# Altium PCB RMS.PcbDoc
Units mm, origin at the board's own origin, x right, y up, seen from the top; angles counter-clockwise.
Board outline 38 x 48 mm, 2 copper layers (Top Layer, Bottom Layer); 23 components, 19 nets, 107 pads, 22 vias.
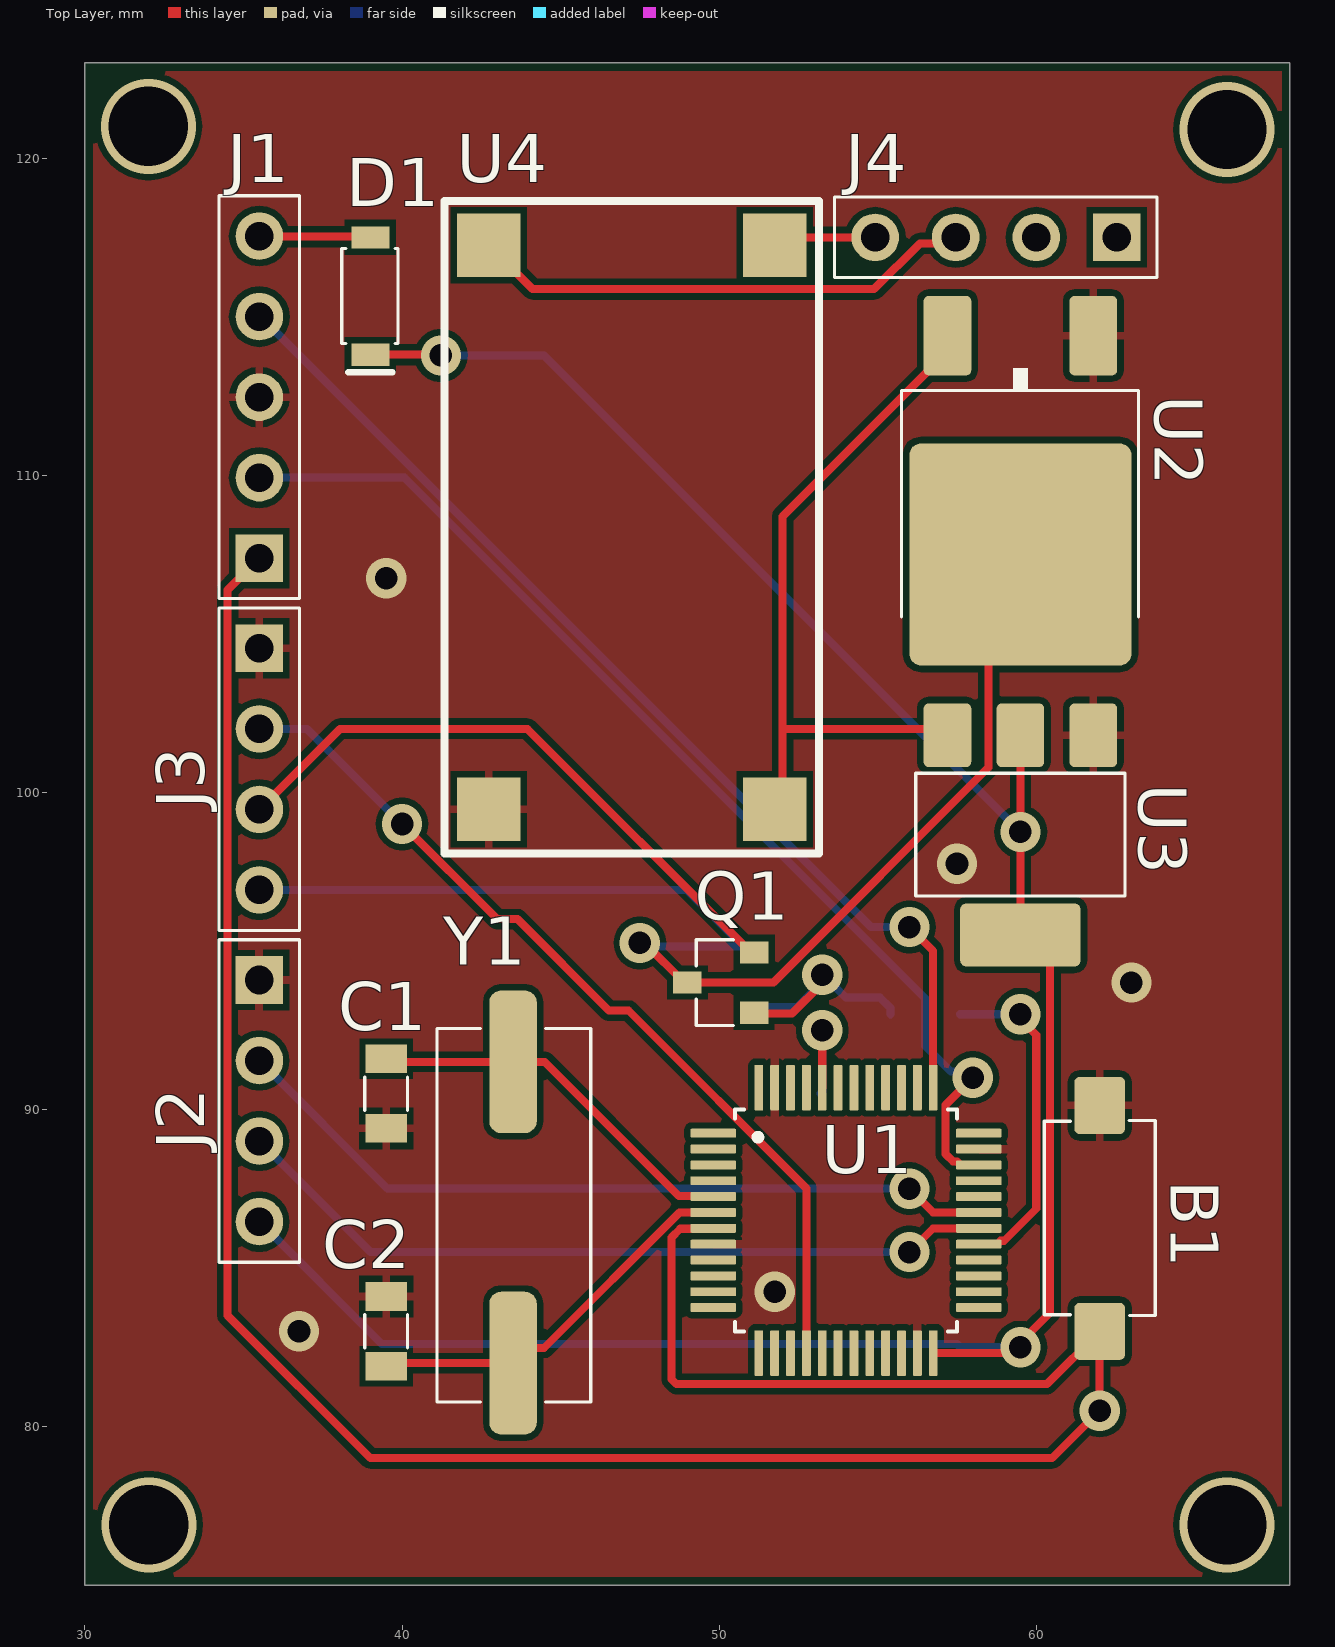
[diagram p0: Top Layer view]
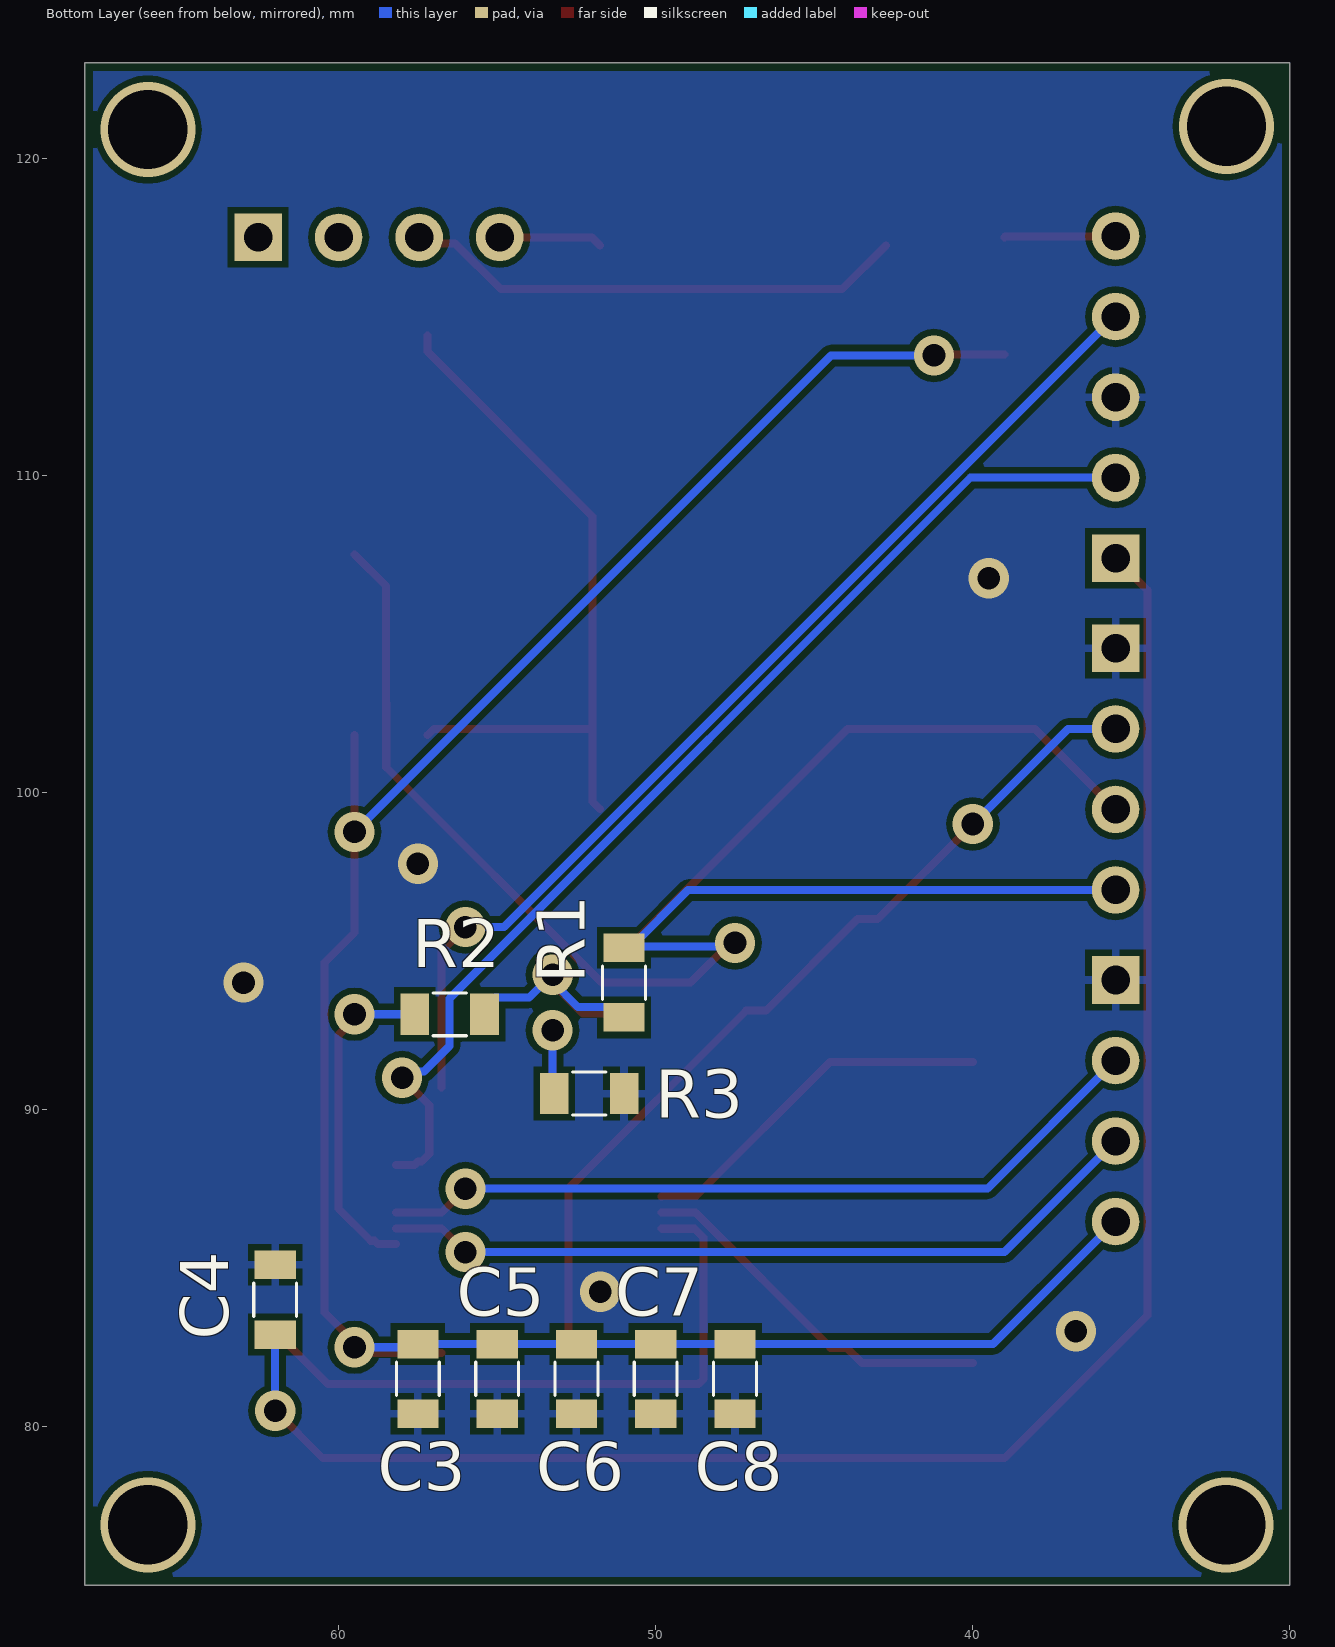
[diagram p1: Bottom Layer view, seen from below]
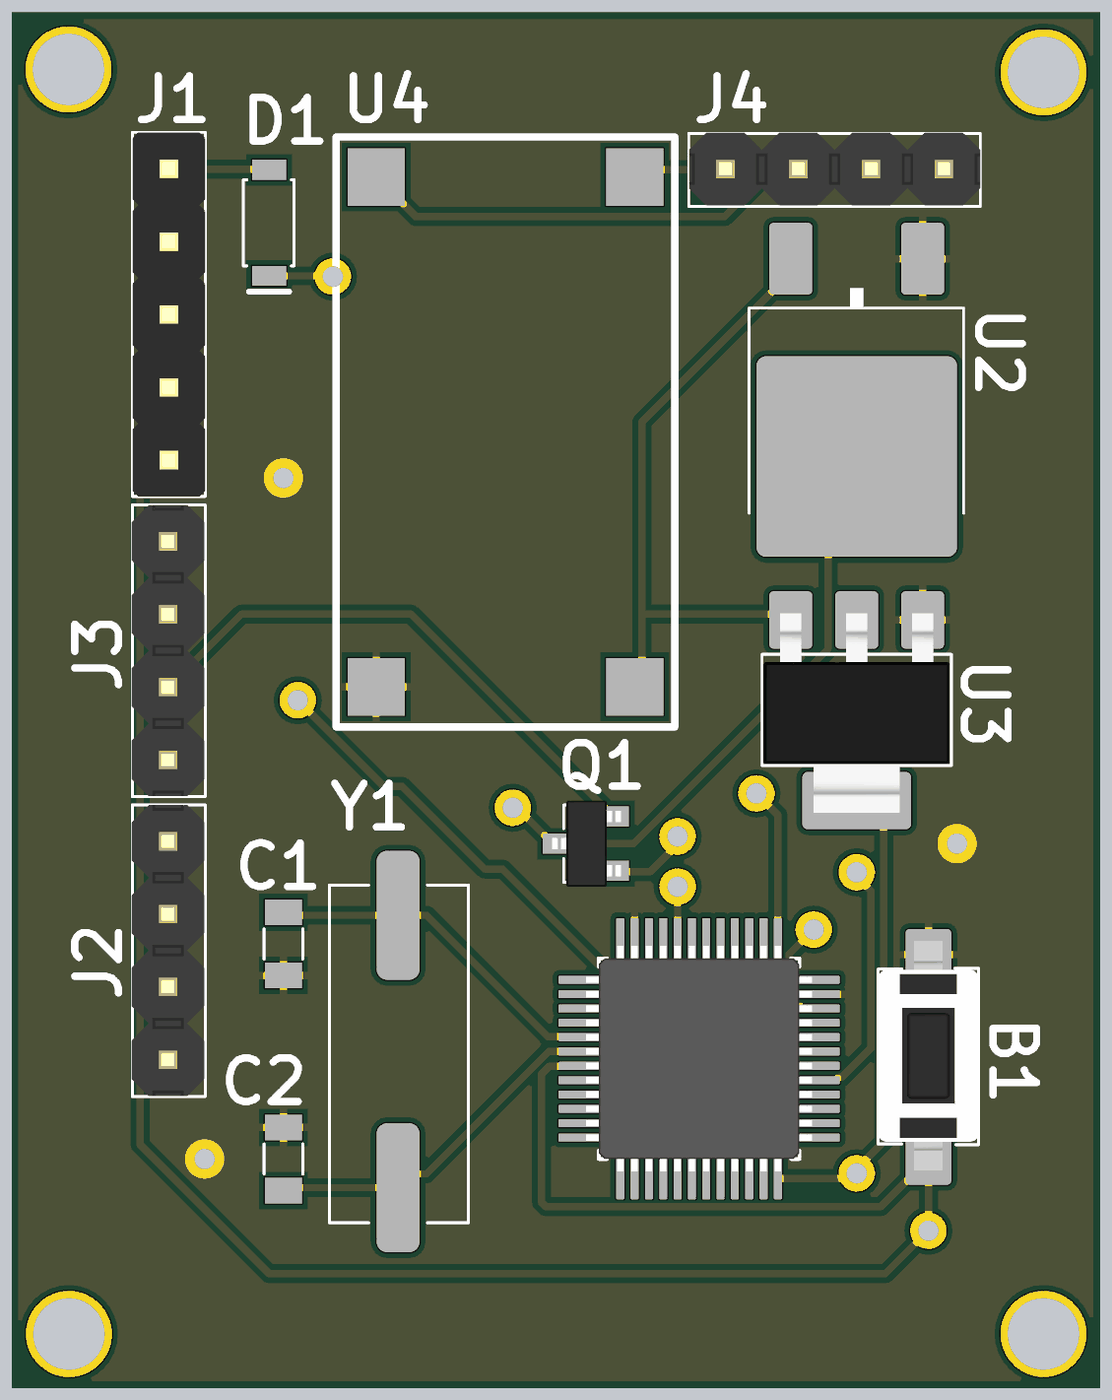
[diagram p2: 3D render of the assembled board from above, using the file's embedded part models]

## Layer stack, top to bottom
Top Solder: solder mask 0.0102, Solder Resist, Dk 3.5
Top Layer: signal copper 0.0356
Dielectric 1: dielectric 0.32, FR-4, Dk 4.8
Bottom Layer: signal copper 0.0356
Bottom Solder: solder mask 0.0102, Solder Resist, Dk 3.5

## Board outline
30,75 30,123 68,123 68,75
board region "Default Layer Stack Region": 30,75 30,123 68,123 68,75
board region "Default Layer Stack Region": 30,75 30,123 68,123 68,75
board region "Default Layer Stack Region": 30,75 30,123 68,123 68,75
board region "Default Layer Stack Region": 30,75 30,123 68,123 68,75
board region "Layer Stack Region 1": 30,75 30,123 68,123 68,75

## Design rules (kind name [scope] priority, off if disabled: settings)
AcuteAngle [All] p1: minimum=3.50000000000000E+0001 checktracksonly=FALSE
BoardOutlineClearance "BoardOutlineClearance 1" [All] p1: gap=0.25 ignorepadtopadclearanceinfootprint=FALSE except(0: Arc-SplitContinuation Track-SplitContinuation SMDPad-SplitContinuation THPad-SplitContinuation Via-SplitContinuation Fill-SplitContinuation Poly-SplitContinuation Region-SplitContinuation Text-SplitContinuation) // Milling
Clearance "Clearance-1 1/2 Oz" [All] p1: gap=0.125 ignorepadtopadclearanceinfootprint=FALSE except(0.2: Arc-Fill Arc-Poly Track-Fill Track-Poly SMDPad-SMDPad SMDPad-Fill SMDPad-Poly THPad-Fill THPad-Poly Via-Fill Via-Poly Fill-Fill Fill-Poly Poly-Poly Poly-Region Poly-Text; 0.25: Arc-Hole Track-Hole SMDPad-Hole THPad-Hole Via-Hole Fill-Hole Poly-Hole Region-Hole Text-Hole) // Standart
ComponentClearance [All] p1: gap=0.1 collisioncheckmode=3 verticalgap=0.1 showdistances=FALSE
DiffPairsRouting "DiffPairsRouting 1/2 Oz" [All] p1: maxlimit=0.254 minlimit=0.125 mostfreqgap=0.254 toplayer_minwidth=0.125 toplayer_maxwidth=0.381 toplayer_prefwidth=0.381 bottomlayer_minwidth=0.125 bottomlayer_maxwidth=0.381 bottomlayer_prefwidth=0.381 maxuncoupledlength=12.7
HoleSize "Minimum HoleSize" [IsPad] p1: absolutevalues=TRUE maxlimit=5.9 minlimit=0.6 maxpercent=80.000 minpercent=20.000
HoleSize "Minimum HoleSize VIA 1" [IsVia] p2: absolutevalues=TRUE maxlimit=5.9 minlimit=0.3 maxpercent=80.000 minpercent=20.000 // Standart
HoleToHoleClearance Hole2HoleClearance [All] p1: gap=0.25 allowstackedmicrovias=FALSE
MinimumAnnularRing "Minimum AR VIA Standart" [All] p1: minimumring=0.15
MinimumAnnularRing "Minimum AR PAD Standart" [All] p2: minimumring=0.2
MinimumSolderMaskSliver "SolderMask Bridge Standart" [All] p1: minsoldermaskwidth=0.15 // All Masks
PlaneClearance "PlaneClearance-1 1/2 Oz" [All] p1: clearance=0.2 // Standart
PlaneConnect "TermalConnect-1 1/2 Oz" [All] p1: planeconnectstyle=Relief reliefexpansion=0.2 reliefentries=4 reliefconductorwidth=0.2 reliefairgap=0.2 // Standart
PolygonConnect "PolygonConnect-1 1/2 Oz" [All] p1: thpad.connectstyle=Relief thpad.reliefconductorwidth=0.254 thpad.reliefentries=4 thpad.polygonreliefangle="90 Angle" thpad.airgapwidth=0.2 smdpad.connectstyle=Relief smdpad.reliefconductorwidth=0.254 smdpad.reliefentries=4 smdpad.polygonreliefangle="90 Angle" smdpad.airgapwidth=0.2 via.connectstyle=Direct via.reliefconductorwidth=0.254 via.reliefentries=4 via.polygonreliefangle="90 Angle" via.airgapwidth=0.254 // Standart
RoutingCorners [All] p1 off: cornerstyle=45-Degree minsetback=2.54 maxsetback=2.54
RoutingVias [All] p1: holewidth=0.4 width=0.8 viastyle="Through Hole" minholewidth=0.3 minwidth=0.6 maxholewidth=5.9 maxwidth=8.9
SilkToSilkClearance Silk2SilkClearance [All] p1 off: silktosilkclearance=0.15
SilkToSolderMaskClearance Silk2SolderMaskClearance [IsPad] p1 off: minsilkscreentomaskgap=0.15 clearancetoexposedcopper=TRUE
SolderMaskExpansion SolderMaskExpansion-1 [All] p1: expansion=0.05 istentingtop=FALSE // Standart
UnRoutedNet [All] p1: checkbadconnections=TRUE
Width "Width 1/2 Oz" [All] p1: maxlimit=10 minlimit=0.125 preferedwidth=0.254 checkconnectedcopper=TRUE
19 further rules are at their usual default settings.

## Components (designator, comment, footprint, x,y, rotation, side; value= is the part's Value field where it differs from the comment)
B1 "But" "BUTTON 6x3.5" 62,90.125 r0 top
C1 "3.9pF" "0805 Capicator" 39.5,90.5 r90 top
C2 "3.9pF" "0805 Capicator" 39.5,83 r270 top
C3 "0.1uF" "0805 Capicator" 57.5,81.5 r90 bottom
C4 "0.1uF" "0805 Capicator" 62,84 r270 bottom
C5 "0.1uF" "0805 Capicator" 55,81.5 r90 bottom
C6 "0.1uF" "0805 Capicator" 52.5,81.5 r90 bottom
C7 "0.1uF" "0805 Capicator" 50,81.5 r90 bottom
C8 "4.7uF" "0805 Capicator" 47.5,81.5 r90 bottom
D1 "Diode" sod-123 39,117.5 r270 top
J1 "PLS 5x1" "PLS 5x1" 35.5,107.38 r90 top
J2 "PLS 4x1" "PLS 4x1" 35.5,94.08 r270 top
J3 "PLS 4x1" "PLS 4x1" 35.5,104.54 r270 top
J4 "PLS 4x1" "PLS 4x1" 62.54,117.5 r180 top
Q1 "MOSFET-P" SOT-23 51.1,93.05 r90 top
R1 "10k" "0805 Resistor" 51,94 r90 bottom
R2 "20" "0805 Resistor" 56.5,93 r180 bottom
R3 "3.9k" "0805 Resistor" 52.1,90.5 r0 bottom
U1 "STM32F103C6T6" STM32F103C6T6 54,86.5 r0 top
U2 "LDO 5V" TO-252 59.5,114.4 r180 top
U3 "LDO 3.3V" SOT-223 59.5,101.8 r180 top
U4 "DC-DC" DC-DC 47.5,109.5 r270 top
Y1 "8MHz" hc-49sm 43.5,82 r90 top

## Footprints (in the part's own frame and the unit in brackets; to place one, negate y for a bottom-side part, rotate by r counter-clockwise, add the part's x,y. Pads: shape width x height; smd on the part's side, far side on the other; paste and mask are expansions set on the pad)
"0805 Capicator" [mm]
  rect 0.9x1.3 smd: 1(-1.1,0) 2(1.1,0)
  silkscreen extent -0.53,-0.67 0.53,0.67, body extent -1.05,-0.67 1.05,0.68, height 0.75
"0805 Resistor" [mm]
  rect 0.9x1.3 smd: 1(-1.1,0) 2(1.1,0)
  silkscreen extent -0.53,-0.67 0.53,0.67, body extent -1.05,-0.67 1.05,0.68, height 0.6
"BUTTON 6x3.5" [mm]
  rrect20% 1.6x1.8 smd: 1(0,0) 2(0,-7.125)
  silkscreen extent -1.75,-6.63 1.75,-0.48, body extent -1.75,-7.52 1.75,0.48, height 4.3
DC-DC [mm]
  rect 2x2 smd: 1(-7.747,4.254) 2(-7.747,-4.763) 3(10.033,4.255) 4(10.033,-4.762)
  silkscreen extent -9.14,-6.16 11.43,5.65
hc-49sm [mm]
  rrect50% 4.5x1.5 smd: 1(0,0) 2(9.5,0)
  silkscreen extent -1.23,-2.45 10.55,2.4, body extent -1.7,-2.44 11.1,2.39
"PLS 4x1" [mm] "Connector; Header; 5 Position"
  rect 1.5x1.5 hole 0.9: 1(0,0)
  round 1.5 hole 0.9: 2(2.54,0) 3(5.08,0) 4(7.62,0)
  silkscreen extent -1.27,-1.27 8.9,1.27, body extent -1.27,-1.3 8.89,1.24, height 8.6
"PLS 5x1" [mm] "Connector; Header; 5 Position"
  rect 1.5x1.5 hole 0.9: 1(0,0)
  round 1.5 hole 0.9: 2(2.54,0) 3(5.08,0) 4(7.62,0) 5(10.16,0)
  silkscreen extent -1.27,-1.27 11.43,1.27, body extent -1.28,-1.28 11.42,1.26, height 8.54
sod-123 [mm]
  rect 0.7x1.2 smd: 1(0,0) 2(3.7,0)
  silkscreen extent 0.35,-0.9 4.25,0.87, body extent 0,-0.8 3.7,0.8
SOT-23 [mm]
  rect 0.7x0.9 smd: 1(0,0) 2(1.9,0) 3(0.95,2.1)
  silkscreen extent -0.4,0.65 2.3,1.83, body extent -0.55,-0.17 2.45,2.23, height 1.1
SOT-223 [mm]
  rrect20% 1.5x2 smd: 1(-2.3,0) 2(0,0) 3(2.3,0)
  rrect20% 3.8x2 smd: 2(0,6.3)
  silkscreen extent -3.3,1.2 3.3,5.07, body extent -3.25,-0.23 3.25,6.73, height 1.7
STM32F103C6T6 [mm]
  rrect25% 1.44x0.28 smd: 1(-4.185,2.75) 2(-4.185,2.25) 3(-4.185,1.75) 4(-4.185,1.25) 5(-4.185,0.75) 6(-4.185,0.25) 7(-4.185,-0.25) 8(-4.185,-0.75) 9(-4.185,-1.25) 10(-4.185,-1.75) 11(-4.185,-2.25) 12(-4.185,-2.75) 25(4.185,-2.75) 26(4.185,-2.25) 27(4.185,-1.75) 28(4.185,-1.25) 29(4.185,-0.75) 30(4.185,-0.25) 31(4.185,0.25) 32(4.185,0.75) 33(4.185,1.25) 34(4.185,1.75) 35(4.185,2.25) 36(4.185,2.75)
  rrect25% 0.28x1.44 smd: 13(-2.75,-4.185) 14(-2.25,-4.185) 15(-1.75,-4.185) 16(-1.25,-4.185) 17(-0.75,-4.185) 18(-0.25,-4.185) 19(0.25,-4.185) 20(0.75,-4.185) 21(1.25,-4.185) 22(1.75,-4.185) 23(2.25,-4.185) 24(2.75,-4.185) 37(2.75,4.185) 38(2.25,4.185) 39(1.75,4.185) 40(1.25,4.185) 41(0.75,4.185) 42(0.25,4.185) 43(-0.25,4.185) 44(-0.75,4.185) 45(-1.25,4.185) 46(-1.75,4.185) 47(-2.25,4.185) 48(-2.75,4.185)
  silkscreen extent -3.5,-3.5 3.5,3.5, body extent -4.5,-4.5 4.5,4.5, height 0.72
TO-252 [mm]
  rrect20% 1.5x2.5 smd: 1(-2.3,0) 3(2.3,0)
  rrect10% 7x7 smd: 2(0,6.9)
  silkscreen extent -3.72,1.02 3.75,8.87, body extent -3.38,-0.65 3.35,9.45, height 2.37

## Part data
B1: library part Button, "Button 2 Conn SMD"
C1 C2: library part "Cap 39pF"
C3 C4 C5 C6 C7: library part "Cap 0.1uF"
C8: library part "Cap 4.7uF"
D1: library part "Diode Schottky", "0.5 A, Low Forward Voltage less than 385 mV, 400 mW Power Dissipation Package"
J1: library part "Conn 5", "Header, 5-Pin"
J2 J3 J4: library part "Conn 4", "Header, 4-Pin"
Q1: "P-Channel Power MOSFET 12V to 20V, Infineon"
R1: library part "Res 10k"
R2: library part "Res 20"
R3: library part "Res 3.9k"
U2: "LDO Regulator Pos 5V 1A"
U3: "LDO Regulator Pos 3.3V 1.3A 4-Pin(3+Tab) SOT-223 T/R"
Y1: library part "Crystal 8MHz", "Crystal. HC-49SM (US)"

## Via types
v1: diameter 1.27, hole 0.711, Top Layer to Bottom Layer, 18 vias
v2: diameter 3, hole 2.5, Top Layer to Bottom Layer, 4 vias

## Nets (pads, with @x,y where several pads share a name; then routed paths per layer and width w, separated by ;. In a path a pad name is that pad's centre, name@x,y a point inside that pad or via, vN(x,y) a via of type N, cw(c..) or ccw(c..) an arc to the next point about the centre after c; other vN are vias at no path point)
+3.3V: C3.2 C5.2 C6.2 C7.2 C8.2 D1.2 J2.4 U1.24 U3.2 | length 75.3
  Top Layer w0.254: D1.2 41.2,113.8 v1@41.25,113.75 ; U1.24 59.315,82.315 v1(59.5,82.5) 59.5,82.657 60.44,83.596 60.44,94.633 59.5,95.572 v1(59.5,98.75) U3.2@59.5,101.8
  Bottom Layer w0.254: J2.4 39.36,82.6 C8.2 C7.2 C6.2 C5.2 C3.2 57.6,82.5 v1(59.5,82.5) ; v1(41.225,113.775) 44.475,113.775 v1(59.5,98.75)
+5V: J3.4 Q1.3 R1.2 U2.2 | length 41.2
  Top Layer w0.254: J3.4 J3.4@35.602,96.818 ; v1(47.5,95.25) 47.65,95.25 48.9,94 51.71,94 58.498,100.788 58.498,102.817 58.5,102.819 58.5,106.5 U2.2
  Bottom Layer w0.254: J3.4 48.98,96.92 R1.2@50.8,95.1 ; v1(47.5,95.25) 47.614,95.136 50.764,95.136 R1.2@50.8,95.1 ; R1.2 R1.2@50.8,95.1
+7.4V: U2.3 U3.3 U4.3 | length 22.5
  Top Layer w0.254: U4.3 52,99.713 52,102 ; U3.3 57,102 52,102 ; U2.3 57.2,113.9 52,108.7 52,102
+12V: J4.4 U4.1 | length 3.3
  Top Layer w0.254: U4.1 52.008,117.5 J4.4
GND: B1.1 C1.1 C2.1 C3.1 C4.1 C5.1 C6.1 C7.1 C8.1 J1.3 J2.1 J3.1 R3.1 U1.8 U1.23 U1.35 U1.47 U2.1 U3.1 U4.4
  other v1: 36.75,83 51.75,84.25 63,94 57.5,97.75 39.5,106.75
GND12: J4.3 U4.2 | length 16
  Top Layer w0.254: U4.2 44.118,115.866 54.885,115.866 56.329,117.31 57.27,117.31 J4.3
NetC1_2: C1.2 U1.5 Y1.2 | length 11.6
  Top Layer w0.254: C1.2@40,91.5 44.5,91.5 48.737,87.263 49.802,87.263 U1.5
NetC2_2: C2.2 U1.6 Y1.1 | length 11.8
  Top Layer w0.254: C2.2@40,82 Y1.1 43.982,82.482 44.482,82.482 48.75,86.75 U1.6
NetD1_1: D1.1 J1.5 | length 3.5
  Top Layer w0.254: J1.5 35.52,117.52 38.98,117.52 D1.1
NetQ1_1: Q1.1 R1.1 R2.2 | length 8.6
  Top Layer w0.254: Q1.1 51.125,93.025 52.3,93.025 53.25,93.975 v1(53.25,94.25)
  Bottom Layer w0.254: R1.1 51.323,93.223 52.448,93.223 53.25,94.025 v1(53.25,94.25) 53.275,94.25 54.002,93.523 55.077,93.523 55.4,93.2 R2.2
NetR3_2: R3.2 U1.44 | length 3.8
  Top Layer w0.254: U1.44 U1.44 v1(53.252,92.498) v1(53.252,92.498)
  Bottom Layer w0.254: R3.2 53.252,90.552 v1(53.252,92.498)
NRST: B1.2 C4.2 J1.1 U1.7 | length 79.3
  Top Layer w0.254: J1.1 34.498,106.378 34.498,83.502 39,79 60.5,79 v1(62,80.5) B1.2 60.342,81.342 48.649,81.342 48.5,81.491 48.5,85.964 48.773,86.237 49.802,86.237 U1.7
  Bottom Layer w0.254: v1(62,80.5) C4.2
servo_contorl: R2.1 U1.29 | length 10.5
  Top Layer w0.254: U1.29 58.765,85.75 58.873,85.858 58.989,85.858 60,86.869 60,92.343 59.5,92.843 v1(59.5,93)
  Bottom Layer w0.254: R2.1 v1(59.5,93)
servo_contorl_PDM: J3.3 Q1.2 | length 19.6
  Top Layer w0.254: J3.3 38.04,102 43.95,102 51,94.95 Q1.2
servo_feedback: J3.2 U1.16 | length 28.4
  Top Layer w0.254: v1(40,99) 43,96 43.637,96 46.524,93.113 47.148,93.113 52.75,87.511 U1.16
  Bottom Layer w0.254: J3.2 37,102 v1(40,99)
SWCLK: J1.4 U1.37 | length 33.8
  Top Layer w0.254: v1(56,95.75) 56.75,95 U1.37
  Bottom Layer w0.254: J1.4 35.536,115 54.786,95.75 v1(56,95.75)
SWDIO: J1.2 U1.34 | length 35.2
  Top Layer w0.254: v1(58,91) 57.142,90.142 57.142,88.597 57.381,88.358 57.497,88.358 57.605,88.25 U1.34
  Bottom Layer w0.254: J1.2 40.08,109.92 56.5,93.5 56.5,92 57.306,91.194 57.806,91.194 v1(58,91)
USART_to_Rasp_RX: J2.2 U1.31 | length 24.7
  Top Layer w0.254: v1(56,87.5) 56.75,86.75 U1.31
  Bottom Layer w0.254: J2.2 39.54,87.5 v1(56,87.5)
USART_to_Rasp_TX: J2.3 U1.30 | length 24.4
  Top Layer w0.254: v1(56,85.5) 56.75,86.25 U1.30
  Bottom Layer w0.254: J2.3 39,85.5 v1(56,85.5)
pads on no net: J4.1 J4.2 U1.1 U1.2 U1.3 U1.4 U1.9 U1.10 U1.11 U1.12 U1.13 U1.14 U1.15 U1.17 U1.18 U1.19 U1.20 U1.21 U1.22 U1.25 U1.26 U1.27 U1.28 U1.32 U1.33 U1.36 U1.38 U1.39 U1.40 U1.41 U1.42 U1.43 U1.45 U1.46 U1.48
copper on no net:
  other v2: 32.016,76.898 66.016,76.898 66.016,120.898 32,121

## Polygon pours and split planes (outlines as drawn)
GND on Top Layer "GND_poly_upper" (solid, remove dead copper, pour order 0): 30,75 30,123 68,123 68,75
GND on Bottom Layer "GND_poly_lower" (solid, remove dead copper, pour order 1): 30,75 30,123 68,123 68,75